# Altium PCB eth_a.PcbDoc
Units mm, origin at the board's own origin, x right, y up, seen from the top; angles counter-clockwise.
Board outline 75 x 75 mm, 2 copper layers (Top Layer, Bottom Layer); 87 components, 70 nets, 372 pads, 90 vias.
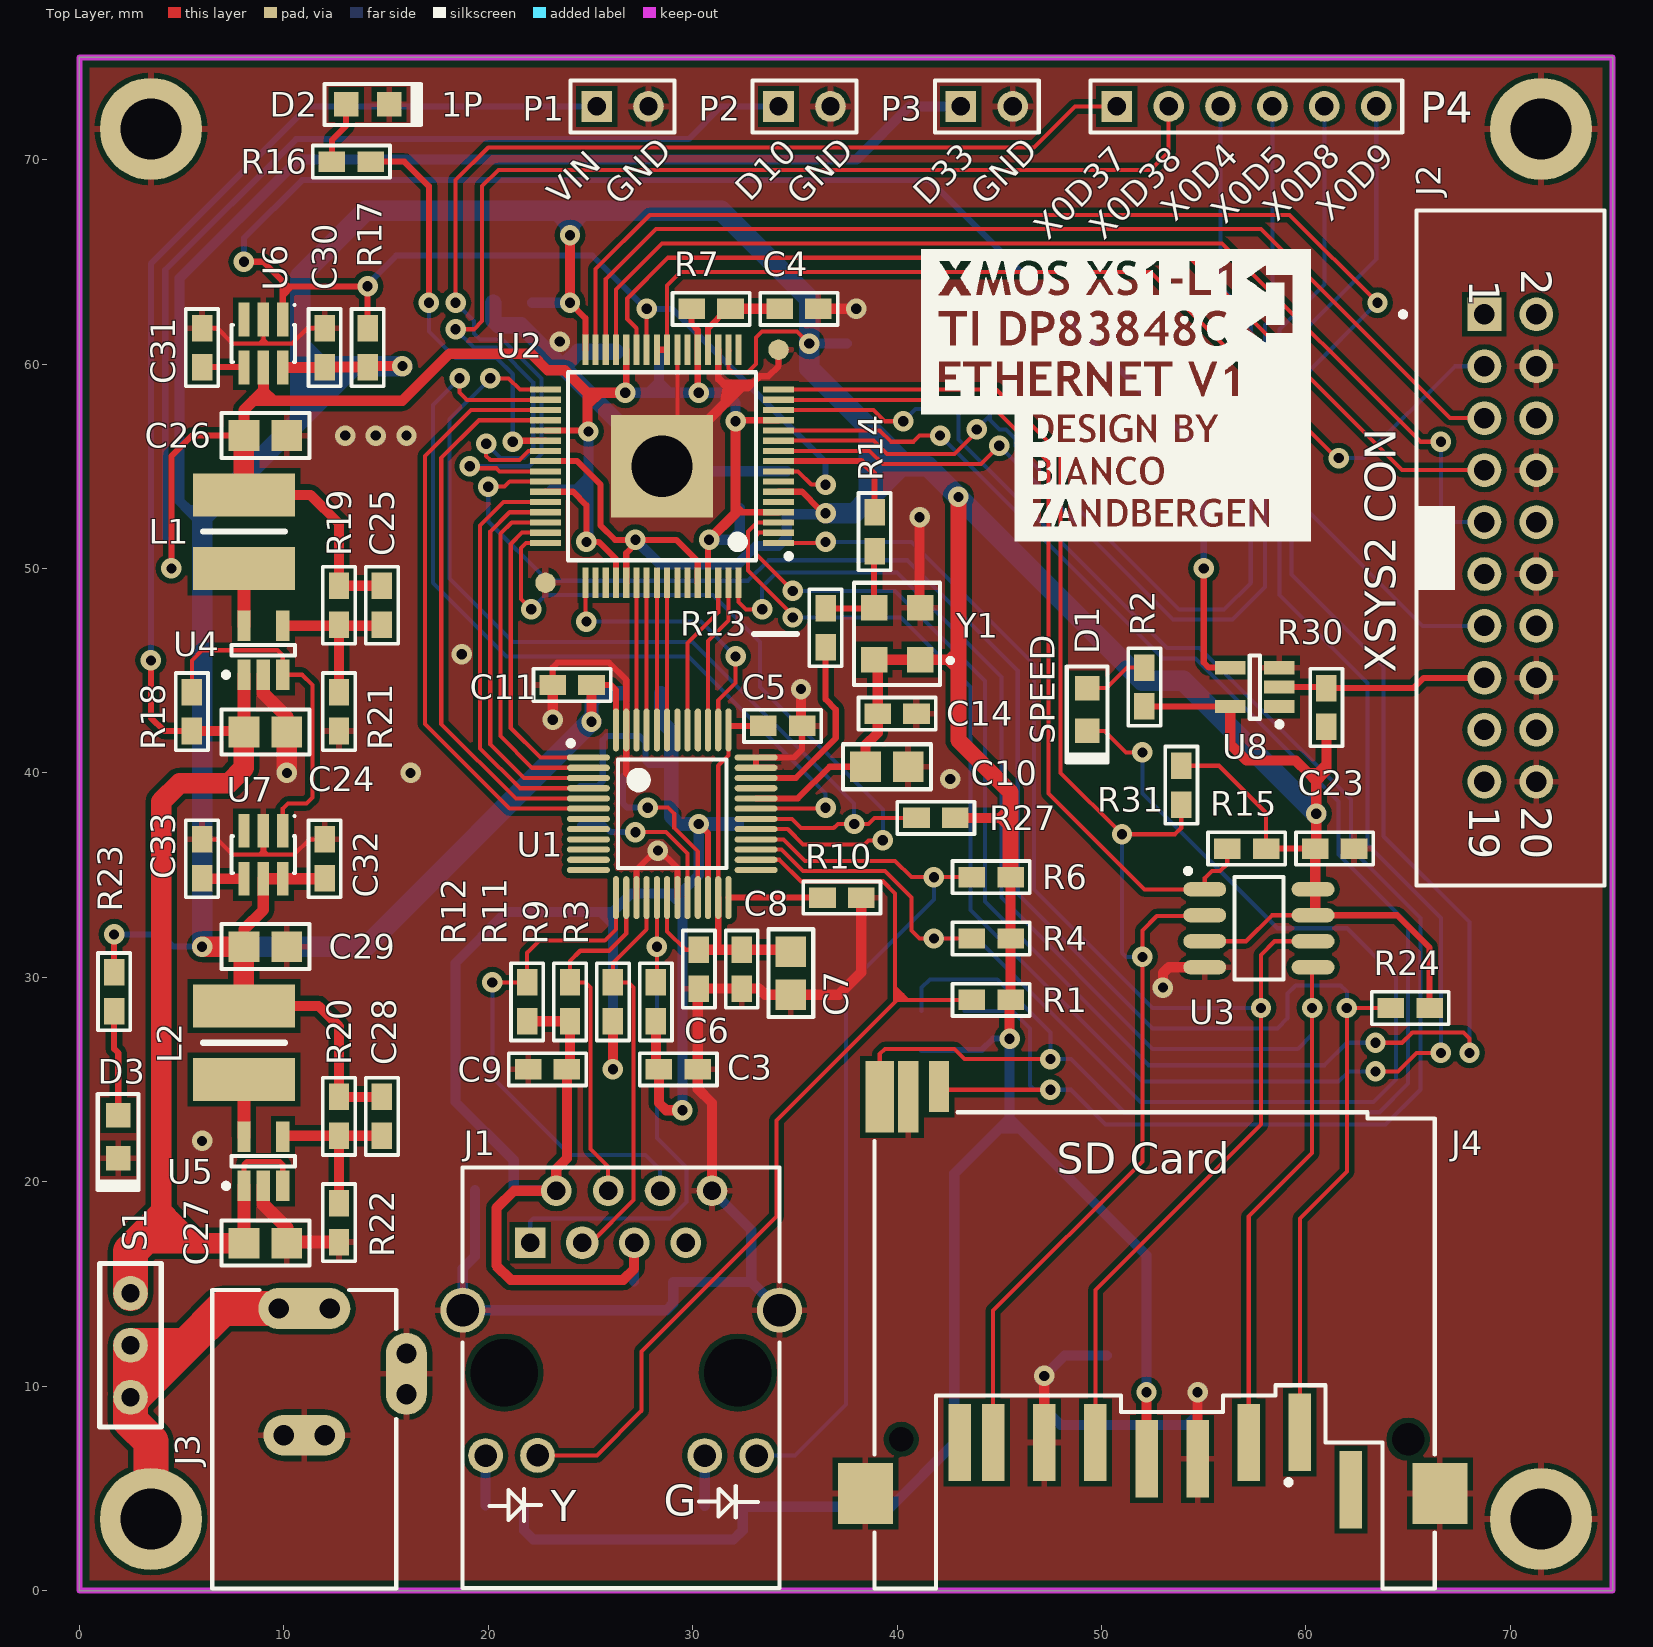
[diagram p0: Top Layer view]
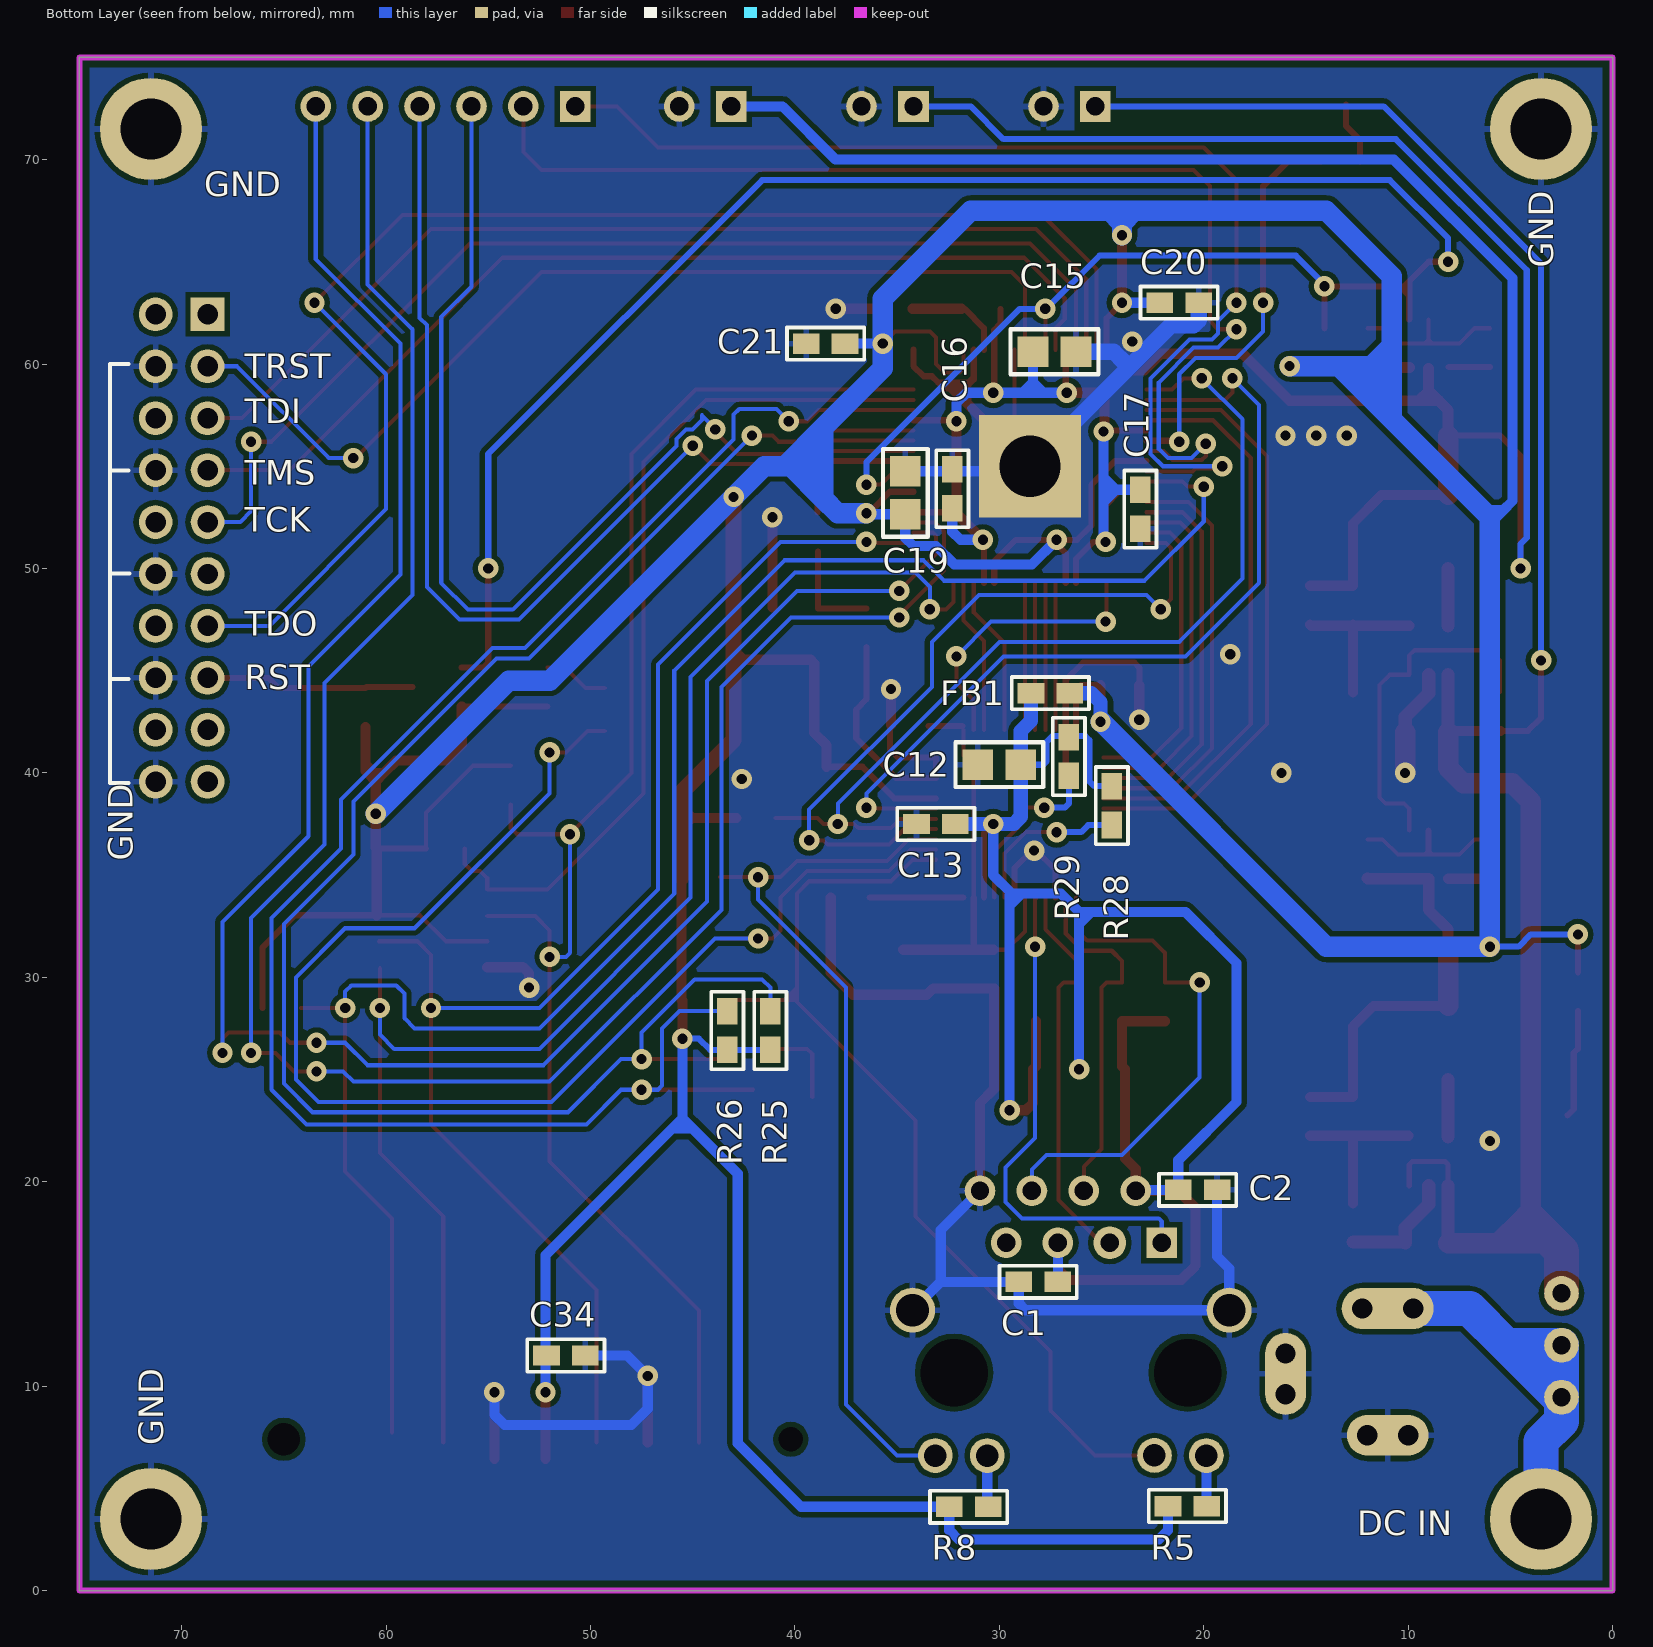
[diagram p1: Bottom Layer view, seen from below]
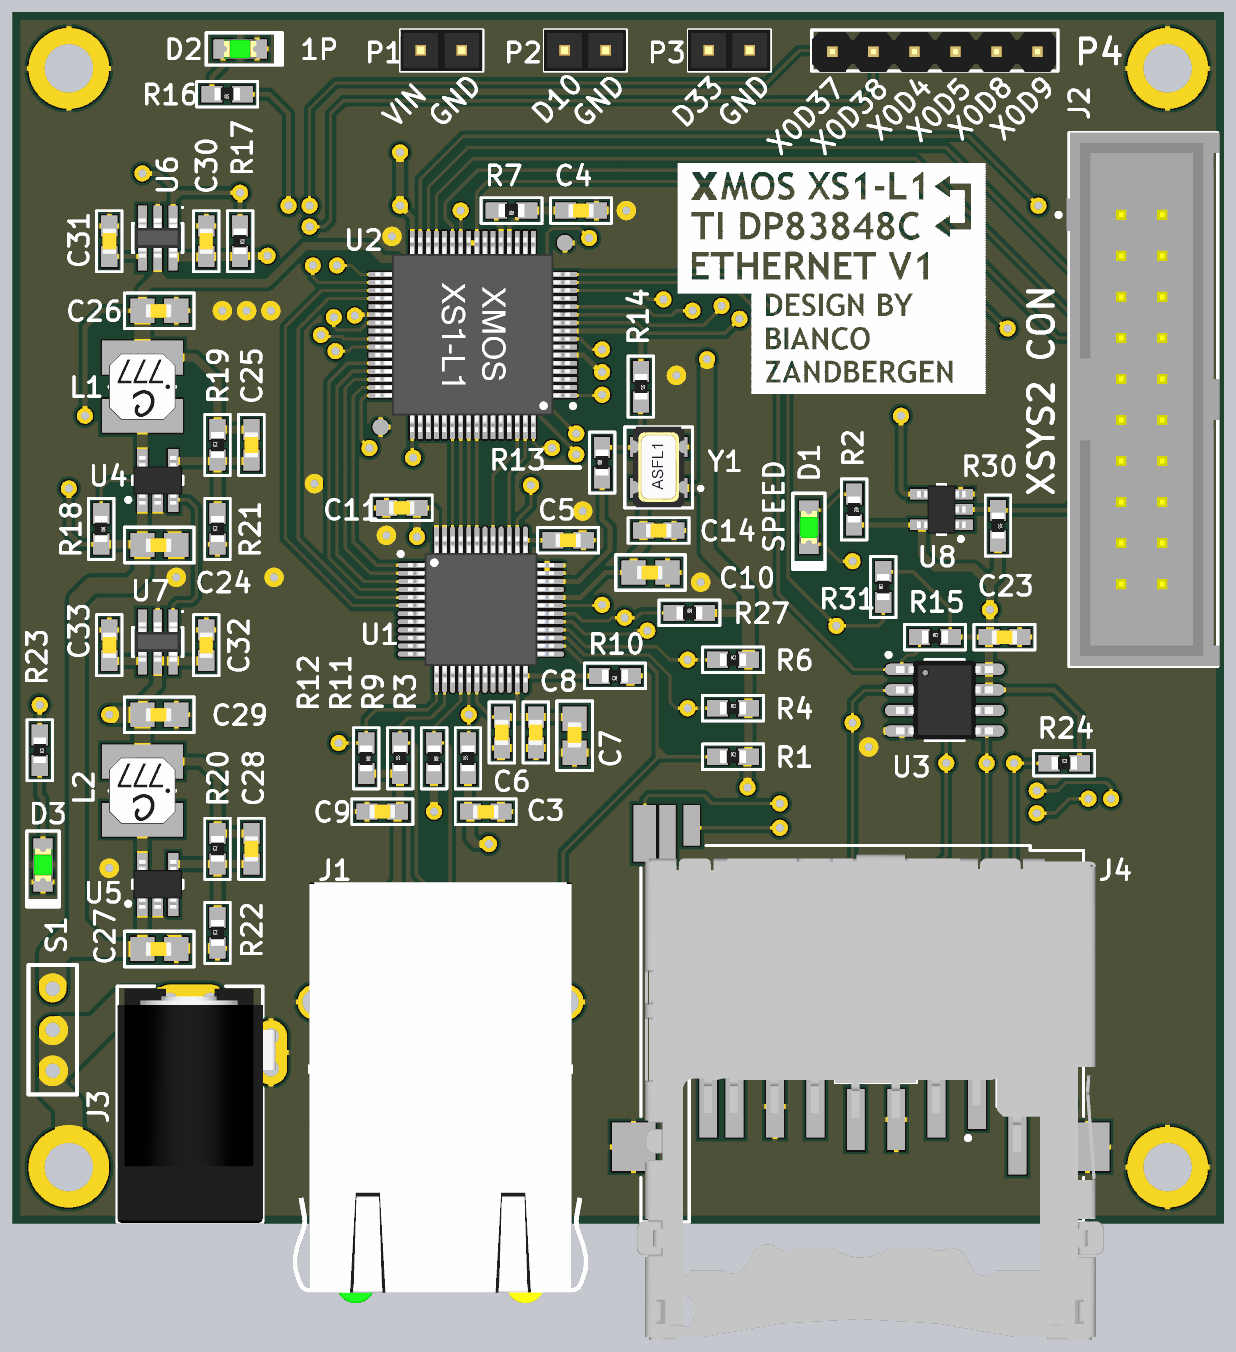
[diagram p2: 3D render of the assembled board from above, using the file's embedded part models]
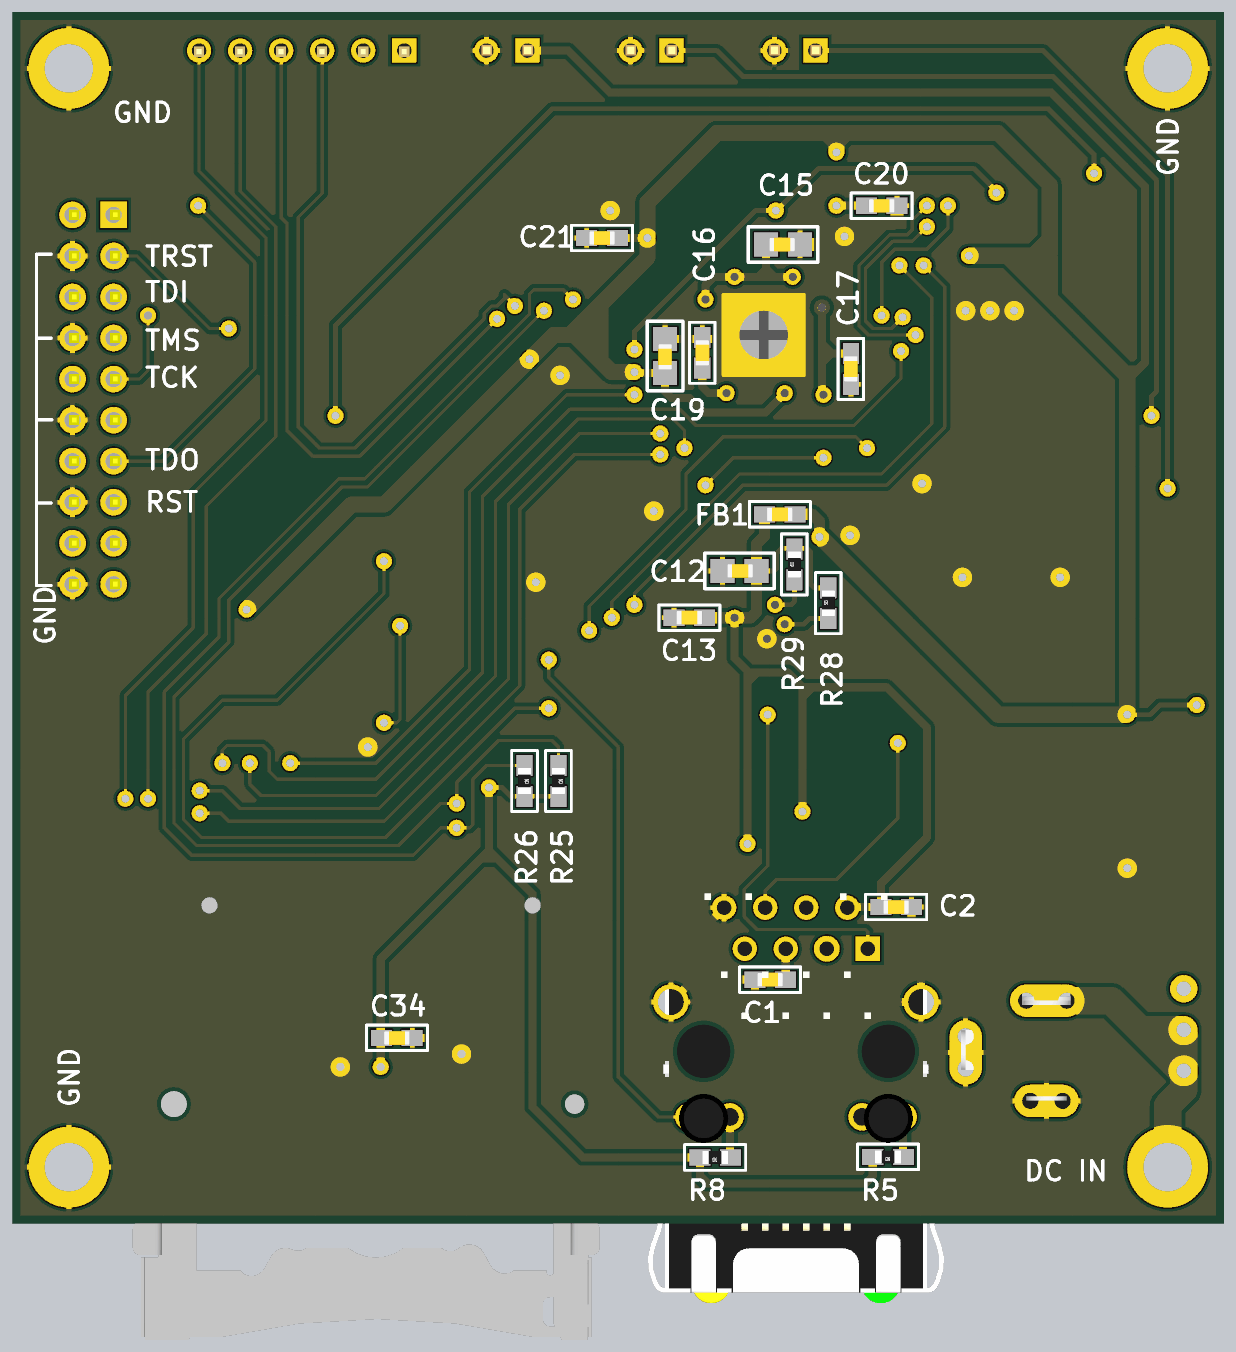
[diagram p3: 3D render of the assembled board from below, using the file's embedded part models]

## Layer stack, top to bottom
Top Layer: signal copper 0.0356
Dielectric: dielectric 0.32, FR-4, Dk 4.8
Bottom Layer: signal copper 0.0356

## Board outline
0,0 75,0 75,75 0,75

## Design rules (kind name [scope] priority, off if disabled: settings)
Clearance Clearance_Polygon [InPolygon] p1: gap=0.25
Clearance [All] p2: gap=0.2
ComponentClearance [All] p1 off: gap=0.254 collisioncheckmode=3 verticalgap=0.254 showdistances=FALSE
HoleSize [All] p1: absolutevalues=TRUE maxlimit=6 minlimit=0.025 maxpercent=80.000 minpercent=20.000
MinimumSolderMaskSliver [All] p1: minsoldermaskwidth=0.1
PolygonConnect PolygonConnect_ExposedPadAndVIA [(IsPad && Id = 'U2-65') Or IsVIa] p1: connectstyle=Direct reliefconductorwidth=0.254 reliefentries=4 polygonreliefangle="90 Angle"
PolygonConnect [All] p2: connectstyle=Relief reliefconductorwidth=0.3 reliefentries=4 polygonreliefangle="90 Angle"
RoomDefinition eth_a [InComponentClass('eth_a')] p1 off: confinementstyle=ConfineIn formatcopy=TRUE lockcomponents=FALSE outline 77.537,-16.412 144,-16.412 144,79.092 77.537,79.092
RoutingVias [All] p1: holewidth=0.5 width=1 viastyle="Through Hole" minholewidth=0.5 minwidth=1 maxholewidth=0.5 maxwidth=1
SilkToSilkClearance [All] p1: silktosilkclearance=0.1
SilkscreenOverComponentPads [All] p1: minsilkscreentomaskgap=0.1
SolderMaskExpansion [All] p1: expansion=0.102
Width [All] p1: maxlimit=2 minlimit=0.2 preferedwidth=0.2 minimp=50.000000 maximp=50.000000 favimp=50.000000
23 further rules are at their usual default settings.

## Components (designator, comment, footprint, x,y, rotation, side; value= is the part's Value field where it differs from the comment)
C1 "Cap" 1608[0603]_CAP 28.1,15.1 r180 bottom
C2 "Cap" 1608[0603]_CAP 20.3,19.6 r0 bottom
C3 "Cap" 1608[0603]_CAP 29.3,25.5 r180 top
C4 "Cap" 1608[0603]_CAP 35.2,62.7 r180 top
C5 "Cap" 1608[0603]_CAP 34.4,42.3 r180 top
C6 "Cap" 1608[0603]_CAP 30.3,30.4 r90 top
C7 "Cap" 2012[0805]_CAP 34.8,30.2 r90 top
C8 "Cap" 1608[0603]_CAP 32.4,30.4 r90 top
C9 "Cap" 1608[0603]_CAP 22.9,25.5 r0 top
C10 "Cap" 2012[0805]_CAP 39.5,40.3 r180 top
C11 "Cap" 1608[0603]_CAP 24.1,44.3 r0 top
C12 "Cap" 2012[0805]_CAP 30,40.4 r180 bottom
C13 "Cap" 1608[0603]_CAP 33.1,37.5 r180 bottom
C14 "Cap" 1608[0603]_CAP 40,42.9 r180 top
C15 "Cap" 2012[0805]_CAP 27.3,60.6 r0 bottom
C16 "Cap" 1608[0603]_CAP 32.3,53.9 r270 bottom
C17 "Cap" 1608[0603]_CAP 23.1,52.9 r90 bottom
C19 "Cap" 2012[0805]_CAP 34.6,53.7 r270 bottom
C20 "Cap" 1608[0603]_CAP 21.2,63 r0 bottom
C21 "Cap" 1608[0603]_CAP 38.5,61 r180 bottom
C23 "Cap" 1608[0603]_CAP 61.4,36.3 r180 top
C24 "Cap" 2012[0805]_CAP 9.1,42 r180 top
C25 "Cap" 1608[0603]_CAP 14.8,48.2 r90 top
C26 "Cap" 2012[0805]_CAP 9.1,56.5 r180 top
C27 "Cap" 2012[0805]_CAP 9.1,17 r180 top
C28 "Cap" 1608[0603]_CAP 14.8,23.2 r90 top
C29 "Cap" 2012[0805]_CAP 9.1,31.5 r180 top
C30 "Cap" 1608[0603]_CAP 12,60.8 r270 top
C31 "Optional" 1608[0603]_CAP 6,60.8 r270 top
C32 "Cap" 1608[0603]_CAP 12,35.8 r270 top
C33 "Optional" 1608[0603]_CAP 6,35.8 r270 top
C34 "Cap" 1608[0603]_CAP 51.2,11.5 r0 bottom
D1 "LED3" 2012[0805]_LED 49.3,43.1 r270 top
D2 "LED3" 2012[0805]_LED 14.1,72.7 r0 top
D3 "LED3" 2012[0805]_LED 1.9,22.2 r270 top
FB1 "Ferrite Bead" 1608[0603]_FB 27.5,43.9 r0 bottom
J1 "Steward con RJ45 with magnetics" "Steward Con RJ45" 26.5,0.127 r0 top
J2 "XTAG2 Con" IDC2.54-V20D 70,51 r270 top
J3 "PWR2.5" KLD-0202 11,0.1 r90 top
J4 "SDAMB-01201BT00" SDCARD-SDAMB-012 52.5,14.7 r0 top
L1 "Inductor" BOURNS_SRR4011 8.05,51.8 r180 top
L2 "Inductor" BOURNS_SRR4011 8.05,26.8 r180 top
P1 "Header 2" HDR1X2 25.3,72.6 r0 top
P2 "Header 2" HDR1X2 34.2,72.6 r0 top
P3 "Header 2" HDR1X2 43.12,72.6 r0 top
P4 "Header 6" HDR1X6 50.74,72.6 r0 top
R1 "Res" 1608[0603]_RES 44.6,28.9 r0 top
R2 "Res" 1608[0603]_RES 52.1,44.2 r270 top
R3 "Res" 1608[0603]_RES 28.2,28.8 r90 top
R4 "Res" 1608[0603]_RES 44.6,31.9 r0 top
R5 "Res" 1608[0603]_RES 20.8,4.137 r0 bottom
R6 "Res" 1608[0603]_RES 44.6,34.9 r0 top
R7 "Res" 1608[0603]_RES 30.9,62.7 r180 top
R8 "Res" 1608[0603]_RES 31.5,4.1 r0 bottom
R9 "Res" 1608[0603]_RES 26.1,28.8 r270 top
R10 "Res" 1608[0603]_RES 37.3,33.9 r180 top
R11 "Res" 1608[0603]_RES 24,28.8 r90 top
R12 "Res" 1608[0603]_RES 21.9,28.8 r270 top
R13 "Res" 1608[0603]_RES 36.5,47.1 r90 top
R14 "Res" 1608[0603]_RES 38.9,51.8 r270 top
R15 "Res" 1608[0603]_RES 57.1,36.3 r0 top
R16 "Res" 1608[0603]_RES 13.3,69.9 r180 top
R17 "Res" 1608[0603]_RES 14.1,60.8 r270 top
R18 "Res" 1608[0603]_RES 5.5,43 r270 top
R19 "Res" 1608[0603]_RES 12.7,48.2 r90 top
R20 "Res" 1608[0603]_RES 12.7,23.2 r90 top
R21 "Res" 1608[0603]_RES 12.7,43 r90 top
R22 "Res" 1608[0603]_RES 12.7,18 r90 top
R23 "Res" 1608[0603]_RES 1.7,29.3 r270 top
R24 "Res" 1608[0603]_RES 65.1,28.5 r0 top
R25 "Res" 1608[0603]_RES 41.2,27.4 r270 bottom
R26 "Res" 1608[0603]_RES 43.3,27.4 r270 bottom
R27 "Res" 1608[0603]_RES 41.9,37.8 r0 top
R28 "Res" 1608[0603]_RES 24.5,38.4 r90 bottom
R29 "Res" 1608[0603]_RES 26.6,40.8 r90 bottom
R30 "Res" 1608[0603]_RES 61,43.2 r270 top
R31 "Res" 1608[0603]_RES 53.9,39.4 r90 top
S1 "SW-SPDT" SIP-3 2.5,12 r90 top
U1 "DP83848CVV" TSQFP50P900X900-48M 29,38 r0 top
U2 "XS1_L1_64LQFP" XMOS_QFP50P1200X1200X160-65N 28.5,55 r180 top
U3 "AT25DF041A" SOIC150-8_M 57.7,32.4 r0 top
U4 "NCP1521" SOT23-5 9,46 r90 top
U5 "NCP1521" SOT23-5 9,21 r90 top
U6 "TPS3808G09" SOT23-6 9,61 r180 top
U7 "TPS3808G30" SOT23-6 9,36 r180 top
U8 "SN74LVC1G07" SOT23-5 57.5,44.2 r180 top
Y1 "25 MHz Oscillator" OSC_32_50 40,46.8 r90 top

## Footprints (in the part's own frame and the unit in brackets; to place one, negate y for a bottom-side part, rotate by r counter-clockwise, add the part's x,y. Pads: shape width x height; smd on the part's side, far side on the other; paste and mask are expansions set on the pad)
1608[0603]_CAP [mm] "Chip Resistor / Capacitor; Body 1.6 x 0.8 mm (LxW typ) Handsoldering optimized"
  rect 1.3x1 smd: 1(-0.95,0) 2(0.95,0)
  silkscreen extent -1.89,-0.79 1.89,0.79, body extent -0.8,-0.43 0.8,0.43, height 0.8
1608[0603]_FB [mm] "Chip Resistor / Capacitor; Body 1.6 x 0.8 mm (LxW typ) Handsoldering optimized"
  rect 1.3x1 smd: 1(-0.95,0) 2(0.95,0)
  silkscreen extent -1.89,-0.79 1.89,0.79, body extent -0.8,-0.43 0.8,0.43, height 0.8
1608[0603]_RES [mm] "Chip Resistor / Capacitor; Body 1.6 x 0.8 mm (LxW typ) Handsoldering optimized"
  rect 1.3x1 smd: 1(-0.95,0) 2(0.95,0)
  silkscreen extent -1.89,-0.79 1.89,0.79, body extent -0.8,-0.4 0.8,0.4, height 0.3
2012[0805]_CAP [mm] "Chip Resistor / Capacitor; Body 2.0 x 1.3 mm (LxW typ) Handsoldering optimized"
  rect 1.5x1.5 smd: 1(-1.05,0) 2(1.05,0)
  silkscreen extent -2.15,-1.1 2.15,1.1, body extent -0.75,-0.43 0.85,0.44, height 0.8
2012[0805]_LED [mm] "Kingbright KPHCM-2012SGC-T"
  rect 1.2x1.2 smd: 1(-1.05,0) 2(1.05,0)
  silkscreen extent -2.1,-1 2.6,1, body extent -1.01,-0.62 1.01,0.63, height 1.1
BOURNS_SRR4011 [mm] "5x5mm Inductor"
  rect 5x2.1 smd: 1(0,1.8) 2(0,-1.8)
  silkscreen extent -2,0 2,0, body extent -2.05,-2.05 2.05,2.05, height 1.8
HDR1X2 [mm] "Connector; Header; 2 Position"
  rect 1.5x1.5 hole 0.9: 1(0,0)
  round 1.5 hole 0.9: 2(2.54,0)
  silkscreen extent -1.27,-1.27 3.81,1.27, body extent -1.29,-1.25 3.79,1.29, height 8.54
HDR1X6 [mm] "Connector; Header; 6 Position"
  rect 1.5x1.5 hole 0.9: 1(0,0)
  round 1.5 hole 0.9: 2(2.54,0) 3(5.08,0) 4(7.62,0) 5(10.16,0) 6(12.7,0)
  silkscreen extent -1.27,-1.27 13.97,1.27, body extent -1.26,-1.32 13.88,1.18, height 8.2
IDC2.54-V20D [mm] "Connector; IDC, Low Profile Male Header, Thru-Hole; 20 Position; Vertical; Pitch 2.54 mm; Body 33.02 x 9.2 x 9.45 mm (LxWxH)"
  rect 1.65x1.65 hole 1: 1(-11.43,-1.27)
  round 1.65 hole 1: 2(-11.43,1.27) 3(-8.89,-1.27) 4(-8.89,1.27) 5(-6.35,-1.27) 6(-6.35,1.27) 7(-3.81,-1.27) 8(-3.81,1.27) 9(-1.27,-1.27) 10(-1.27,1.27) 11(1.27,-1.27) 12(1.27,1.27) 13(3.81,-1.27) 14(3.81,1.27) 15(6.35,-1.27) 16(6.35,1.27) 17(8.89,-1.27) 18(8.89,1.27) 19(11.43,-1.27) 20(11.43,1.27)
  silkscreen extent -16.51,-5.37 16.51,4.6, body extent -16.52,-4.75 16.5,4.72, height 9.27
KLD-0202 [mm] "DC Power Jack, 2.5mm, KLD Series, PCB Mount"
  oval 2x4.5 all layers, no hole: 1(13.7,0)
  round 1.5 hole 1: 1A(13.7,-1.25) 1B(13.7,1.25) 2A(7.5,-1) 2B(7.5,1) 3A(9.5,-5) 3B(11.5,-5)
  oval 2x4 all layers, no hole: 2(7.5,0)
  oval 4x2 all layers, no hole: 3(10.5,-5)
  silkscreen extent 0,-4.5 14.6,4.5, body extent -0.05,-5.3 14.45,4.5, height 11
OSC_32_50 [mm] "Oscillator, 3,2mm x 5mm"
  rect 1.25x1.3 smd: 1(-1.27,-1.125) 2(1.27,-1.125) 3(1.27,1.125) 4(-1.27,1.125)
  silkscreen extent -2.5,-2.7 2.5,2.1, body extent -2.47,-1.6 2.53,1.6, height 1.33
SDCARD-SDAMB-012 [mm] "Connector; SD Card Type A, SM, 9 Position, Right Angle, Pitch 2.5 mm, Body 23.3 x 27.4 x 3.4 mm (LxWxH)"
  rect 1.1x3.79 smd: 1(7.2,-6.955) 2(4.7,-7.455) 3(2.2,-8.255) 4(-0.3,-8.255) 5(-2.8,-7.455) 6(-5.3,-7.455) 7(-7.8,-7.455) 8(-9.425,-7.455) 9(9.7,-9.755)
  rect 2.7x3 smd: MH1(14.05,-9.95) MH2(-14.05,-9.95)
  round 0.9 hole 1.2 unplated: MH3(-12.3,-7.3)
  round 1.3 hole 1.6 unplated: MH4(12.5,-7.3)
  rect 1x3.5 smd: SW1(-11.95,9.45)
  rect 1.4x3.5 smd: SW2(-13.35,9.45)
  rect 1x2.5 smd: SW3(-10.45,9.95)
  silkscreen extent -13.6,-14.6 13.8,8.7, body extent -13.85,-21.9 15.05,8.15, height 3.15
SIP-3 [mm]
  round 1.7 hole 0.9: 1(-2.54,0) 2(0,0) 3(2.54,0)
  silkscreen extent -4,-1.5 4,1.5
SOIC150-8_M [mm] "8-Pin Plastic Narrow Body Small Outline Integrated Circuit 1.27 mm Pitch, IPC Low Density"
  oval 2.1x0.7 smd: 1(-2.65,1.905) 2(-2.65,0.635) 3(-2.65,-0.635) 4(-2.65,-1.905) 5(2.65,-1.905) 6(2.65,-0.635) 7(2.65,0.635) 8(2.65,1.905)
  silkscreen extent -3.59,-2.5 1.2,2.93, body extent -3,-2.45 3,2.45, height 1.7
SOT23-5 [mm] "SOT23, 5-Leads, Body 2.9x1.6mm, Pitch 0.95mm, Lead Span 2.8mm, IPC Medium Density"
  rect 1.5x0.65 smd: 1(-1.2,0.95) 2(-1.2,0) 3(-1.2,-0.95) 4(1.2,-0.95) 5(1.2,0.95)
  silkscreen extent -1.32,-1.55 0.25,1.95, body extent -1.5,-1.5 1.5,1.5, height 1.5
SOT23-6 [mm] "SOT-23/SC-74A; 6 Leads; Body 3 x 3 mm, inc. leads (LxW max)"
  rect 0.55x1.65 smd: 1(-0.95,-1.175) 2(0,-1.175) 3(0.95,-1.175) 4(0.95,1.175) 5(0,1.175) 6(-0.95,1.175)
  silkscreen extent -1.58,-1.94 1.55,0.9, body extent -1.4,-1.21 1.39,1.21, height 1.09
"Steward Con RJ45" [mm] "Connector; PCB Jack, Thru-Hole; 1-Port; Unshielded without Lightpipes; Right Angle"
  rect 1.5x1.5 hole 0.9: 1(-4.445,16.89)
  round 1.5 hole 0.9: 2(-3.175,19.43) 4(-0.635,19.43) 5(0.635,16.89) 6(1.905,19.43) 7(3.168,16.889) 8(4.445,19.43)
  round 1.6 hole 0.9: 3(-1.905,16.89)
  round 2.2 hole 1.6: 9(-7.745,13.59) 10(7.745,13.59)
  round 1.7 hole 1.1: 11(-6.63,6.48) 12(-4.09,6.484) 13(4.09,6.48) 14(6.63,6.48)
  round 2.95 hole 3.3 unplated: MH1(-5.715,10.54) MH2(5.715,10.54)
  silkscreen extent -7.75,0 7.75,20.58, body extent -9.17,-5.05 9.17,21, height 14.36
TSQFP50P900X900-48M [mm] "Thin QFP, 48-Leads, Body 7x7mm, Pitch 0.5mm, IPC Low Density"
  oval 2.1x0.3 smd: 1(-4.1,2.75) 2(-4.1,2.25) 3(-4.1,1.75) 4(-4.1,1.25) 5(-4.1,0.75) 6(-4.1,0.25) 7(-4.1,-0.25) 8(-4.1,-0.75) 9(-4.1,-1.25) 10(-4.1,-1.75) 11(-4.1,-2.25) 12(-4.1,-2.75) 25(4.1,-2.75) 26(4.1,-2.25) 27(4.1,-1.75) 28(4.1,-1.25) 29(4.1,-0.75) 30(4.1,-0.25) 31(4.1,0.25) 32(4.1,0.75) 33(4.1,1.25) 34(4.1,1.75) 35(4.1,2.25) 36(4.1,2.75)
  oval 0.3x2.1 smd: 13(-2.75,-4.1) 14(-2.25,-4.1) 15(-1.75,-4.1) 16(-1.25,-4.1) 17(-0.75,-4.1) 18(-0.25,-4.1) 19(0.25,-4.1) 20(0.75,-4.1) 21(1.25,-4.1) 22(1.75,-4.1) 23(2.25,-4.1) 24(2.75,-4.1) 37(2.75,4.1) 38(2.25,4.1) 39(1.75,4.1) 40(1.25,4.1) 41(0.75,4.1) 42(0.25,4.1) 43(-0.25,4.1) 44(-0.75,4.1) 45(-1.25,4.1) 46(-1.75,4.1) 47(-2.25,4.1) 48(-2.75,4.1)
  silkscreen extent -5.09,-2.65 2.65,3.57, body extent -4.5,-4.5 4.52,4.53, height 1.35
XMOS_QFP50P1200X1200X160-65N [mm]
  rect 1.5x0.3 smd: 1(-5.7,3.75) 2(-5.7,3.25) 3(-5.7,2.75) 4(-5.7,2.25) 5(-5.7,1.75) 6(-5.7,1.25) 7(-5.7,0.75) 8(-5.7,0.25) 9(-5.7,-0.25) 10(-5.7,-0.75) 11(-5.7,-1.25) 12(-5.7,-1.75) 13(-5.7,-2.25) 14(-5.7,-2.75) 15(-5.7,-3.25) 16(-5.7,-3.75) 33(5.7,-3.75) 34(5.7,-3.25) 35(5.7,-2.75) 36(5.7,-2.25) 37(5.7,-1.75) 38(5.7,-1.25) 39(5.7,-0.75) 40(5.7,-0.25) 41(5.7,0.25) 42(5.7,0.75) 43(5.7,1.25) 44(5.7,1.75) 45(5.7,2.25) 46(5.7,2.75) 47(5.7,3.25) 48(5.7,3.75)
  rect 0.3x1.5 smd: 17(-3.75,-5.7) 18(-3.25,-5.7) 19(-2.75,-5.7) 20(-2.25,-5.7) 21(-1.75,-5.7) 22(-1.25,-5.7) 23(-0.75,-5.7) 24(-0.25,-5.7) 25(0.25,-5.7) 26(0.75,-5.7) 27(1.25,-5.7) 28(1.75,-5.7) 29(2.25,-5.7) 30(2.75,-5.7) 31(3.25,-5.7) 32(3.75,-5.7) 49(3.75,5.7) 50(3.25,5.7) 51(2.75,5.7) 52(2.25,5.7) 53(1.75,5.7) 54(1.25,5.7) 55(0.75,5.7) 56(0.25,5.7) 57(-0.25,5.7) 58(-0.75,5.7) 59(-1.25,5.7) 60(-1.75,5.7) 61(-2.25,5.7) 62(-2.75,5.7) 63(-3.25,5.7) 64(-3.75,5.7)
  rect 5x5 hole 3: 65(0,0)
  round 1 smd: FID1(-5.7,-5.7) FID2(5.7,5.7)
  silkscreen extent -6.33,-4.6 4.6,4.6, body extent -6,-6.03 6.03,6, height 1.35

## Part data
C1 C2 C3 C4 C5 C6 C7 C8 C9 C10 C11 C12 C13 C14 C15 C16 C17 C19 C20 C21 C23 C24 C25 C26 C27 C28 C29 C30 C32 C34: "Capacitor"
C31 C33: library part Cap, "Capacitor"
D1 D2 D3: "SMD LED 0805"
J1: "Right Angle,RJ45-Keyed, Flange Mount PCB Jack"
J2: library part XTAG2_CON, "XTAG2 Connector"
J3: "Low Voltage Power Supply Connector"
J4: "Secure Digital Card Connector, Type A without Cover; Surface Mount; 9-Position, 1u\" Au Plating"
P1 P2 P3: "Header, 2-Pin"
P4: "Header, 6-Pin"
R1 R2 R3 R4 R5 R6 R7 R8 R9 R10 R11 R12 R13 R14 R15 R16 R17 R18 R19 R20 R21 R22 R23 R24 R25 R26 R27 R28 R29 R30 R31: "Resistor"
S1: "SPDT Subminiature Toggle Switch, Right Angle Mounting, Vertical Actuation"
U1: "PHYTER® Commercial Temperature Single Port 10/100 Mb/s Ethernet Physical Layer Transceiver, 48-pin LQFP"
U3: "4Mbit SPI Flash"
U4 U5: "Buck Converter"
U6: "Power on Reset controller 0.9V"
U7: "Power on Reset controller 3.0V"
U8: "Buffer (open drain output)"
Y1: library part oscillator, "Crystal Oscillator"

## Free pads (board coordinates)
  round 5 hole 3: MH0(3.5,3.5) MH1(3.5,71.5) MH2(71.5,71.5) MH3(71.5,3.5)

## Via types
v1: diameter 1, hole 0.5, Top Layer to Bottom Layer, 89 vias
v2: diameter 1, hole 0.5, Top Layer to Bottom Layer, tented bottom, 1 vias

## Nets (pads, with @x,y where several pads share a name; then routed paths per layer and width w, separated by ;. In a path a pad name is that pad's centre, name@x,y a point inside that pad or via, vN(x,y) a via of type N, cw(c..) or ccw(c..) an arc to the next point about the centre after c; other vN are vias at no path point)
A33: C1.2 C2.2 C3.2 C9.2 C12.2 C13.2 FB1.2 J1.2 J1.5 R3.1 R9.2 R11.1 R12.2 R28.2 R29.2 U1.22 | length 105.9
  Top Layer w0.3: v1(30.3,37.5) 30.75,37.05 U1.22
  Top Layer w0.5: R12.2 R11.1 C9.2@24,25.65 ; C9.2 23.85,21.15 23.325,20.625 J1.2 21.257,19.557 20.4,18.7 20.4,15.9 21.1,15.2 26.6,15.2 27.135,15.735 J1.5 ; v1(26.1,25.5) R9.2 ; C3.2@28.2,25.65 R3.1 ; C3.2 28.35,23.85 28.7,23.5 v1(29.5,23.5)
  Bottom Layer w0.3: R28.2 25.35,39.35 25.6,39.6 25.6,41.6 25.8,41.8 27.4,41.8 27.7,41.5 27.7,40.55 27.85,40.4 C12.2
  Bottom Layer w0.5: J1.2@23.282,19.6 C2.2 21.25,21.05 18.4,23.9 18.4,30.7 20.9,33.2 26.1,33.2 ; 25.6,33.1 26.1,32.6 ; v1(26.1,25.5) 26.1,32.6 ; C1.2@27.135,15.115 J1.5 ; 28.9,34.1 29.5,33.5 ; v1(29.5,23.5) 29.5,33.5 ; 29.5,34 29.5,33.5 ; v1(30.3,37.5) 30.3,35 29.4,34.1 27,34.1 26.1,33.2 ; 26.1,32.6 26.1,33.2
  Bottom Layer w0.7: FB1.2 28.45,42.55 28.95,42.05 C12.2 28.95,37.85 29.3,37.5 v1(30.3,37.5) C13.2
D10: C15.2 C16.2 C17.2 C25.2 C26.2 L1.2 P2.1 R7.2 R19.2 U2.4 U2.13 U2.21 U2.28 U2.37 U2.43 U2.52 U2.61 U6.5 | length 147.8
  Top Layer w0.3: v1(4.5,50) 4.5,55.5 5.5,56.5 C26.2 ; U2.43 24.15,53.75 24.8,53.1 v1(24.8,51.3) 25.4,51.3 26.25,50.45 U2.52 ; U2.37 24.85,56.75 v2(24.9,56.7) ; v1@26.7,58.65 26.75,58.65 U2.28 ; R7.2 29.95,61.96 30.25,61.66 U2.21 v1@30.25,58.65 ; U2.61 v1@30.75,51.35 ; 32.1,52.7 32.15,52.75 32.45,52.75 ; 32.1,53.1 32.45,52.75 ; v1@32.15,57.25 U2.13 ; U2.4 32.45,52.75
  Top Layer w0.5: L1.2 11.3,53.6 12.7,52.2 R19.2 C25.2 ; 8.5,58.2 9.5,58.2 ; 9.003,58.703 9.5,58.206 9.5,58.2 ; v2@24.85,56.75 24.85,58 ; v1@26.75,58.5 26.65,58.6 25.45,58.6 ; v1@30.75,51.35 v1(30.8,51.4) 32.1,52.7 32.1,53.1 v1(32.1,57.2) ; 9.5,58.2 15.8,58.2 18.1,60.5 22.1,60.5 22.9,59.7 23.75,59.7 24.85,58.6 ; 24.85,58 25.45,58.6 ; 24.85,58 24.85,58.6 ; 24.85,58.6 25.45,58.6
  Top Layer w0.55: C26.2 8.05,57.75 8.5,58.2 9.003,58.703 U6.5@9.003,59.787
  Top Layer w1: L1.2 C26.2
  Bottom Layer w0.3: v1(4.5,50) 4.5,51.2 4.2,51.5 4.2,64.6 10.6,71 29.8,71 31.4,72.6 P2.1
  Bottom Layer w0.5: C17.2 24.3,53.85 ; 24.85,53.3 24.3,53.85 ; 24.85,53.85 24.3,53.85 ; v1@24.9,51.4 24.9,54.45 ; v2(24.9,56.7) 24.9,54.45 ; v1(26.7,58.6) 27.85,58.6 ; 28.35,58.65 28.35,59.1 ; C15.2 28.35,59.1 ; v1(30.8,51.4) 31.9,51.4 32.3,51.8 C16.2 ; v1(32.1,57.2) 32.1,58.1 31.6,58.6 v1(30.3,58.6) 28.85,58.6 ; 24.3,53.85 24.9,54.45 ; 27.85,58.6 28.35,59.1 ; 27.85,58.6 28.85,58.6 ; 28.35,59.1 28.85,58.6
D33: C10.2 C11.2 C14.2 C19.2 C20.2 C21.2 C23.2 C28.2 C29.2 C30.2 C32.2 C34.2 FB1.1 J4.4 L2.2 P3.1 R1.2 R2.2 R4.2 R5.2 R6.2 R8.2 R15.2 R17.2 R20.2 R23.1 R24.2 R25.2 R26.2 R27.2 R30.2 R31.2 U1.32 U1.48 U2.6 U2.18 U2.32 U2.40 U2.53 U2.60 U3.3 U3.7 U3.8 U6.6 U7.5 U7.6 U8.5 Y1.1 Y1.4 | length 457.5
  Top Layer w0.2: U2.18@31.8,60.65 U2.18 31.75,59.786 31.936,59.6 32.7,59.6 33.1,60 33.1,61.3 33.4,61.6 35.1,61.6 v1(35.7,61) ; R31.2 55.75,40.35 58.05,38.05 R15.2 ; U3.3 57.065,31.765 58.335,33.035 U3.7
  Top Layer w0.3: R23.1 v1(1.7,32.1) ; U2.40 24.35,55.25 25.5,54.1 25.5,52.1 26.2,51.4 v1(27.2,51.4) ; v1(24,63) 24.75,62.25 U2.32 ; C11.2 26,44.3 26.25,44.05 U1.48 ; U2.53 26.75,50.75 27.2,51.2 v1(27.2,51.4) ; U2.60 30.25,50.35 29.2,51.4 v1(27.2,51.4) ; U1.32 35.15,38.75 36.7,40.3 C10.2 ; U2.6 35.35,53.75 36.2,52.9 v1@36.2,52.7 ; R2.2 U8.5 ; R15.2 C23.2 ; U3.7 60.45,33.035 64.465,33.035 66.05,31.45 R24.2
  Top Layer w0.5: L2.2 11.7,28.6 12.7,27.6 R20.2 C28.2 ; R17.2@14.15,59.9 v1(15.8,59.9) ; v1(24,63) v1(24,66.3) ; v1(25.05,42.5) C11.2 ; C10.2 38.45,41.35 39.05,41.95 C14.2 Y1.4@39.05,45.355 ; Y1.4@39.225,45.53 Y1.1 42.53,45.53 ; R27.2 45.05,37.8 ; 42.97,45.53 42.53,45.53 ; 43,45 42.5,45.5 42.53,45.53 ; 43,46 42.53,45.53 ; v1(45.5,27) R1.2@45.5,28.85 ; R1.2 R4.2 R6.2 ; 45.55,37.3 45.05,37.8 ; 45.55,37.8 45.05,37.8 ; 45.55,38.3 45.05,37.8 ; J4.4 v1(52.2,9.7) ; U8.5 56.3,41.4 57.1,40.6 59.5,40.6 60.1,40 ; U3.7@60.45,33.035 C23.2 ; C23.2@60.5,36.35 v1(60.5,38) 60.5,39.6 ; R30.2 61,40.4 ; 60.1,40 60.6,40 ; 60.1,40 60.5,39.6 ; 60.5,39.6 60.9,40 ; 60.6,40 61,40.4 ; 60.6,40 60.9,40 ; 60.9,40 61,40.1 61,40.4
  Top Layer w0.55: C29.2 8.05,32.35 9,33.3 U7.5 U7.6 11.975,34.825 C32.2 ; U6.6 C30.2@11.975,59.825 ; C30.2 R17.2
  Top Layer w0.8: v1(43,53.5) 43,46 43,45 43,41.6 45.55,39.05 45.55,38.3 45.55,37.8 45.55,37.3 R6.2
  Top Layer w1: v1(6,31.5) C29.2 L2.2
  Bottom Layer w0.3: v1(1.7,32.1) 4,32.1 4.6,31.5 v1(6,31.5) ; 5.7,52.5 6,52.5 ; R25.2 R26.2 44.15,26.45 44.7,27 v1(45.5,27)
  Bottom Layer w0.5: 5.7,52.5 5.35,52.85 ; 6.35,52.85 5.35,52.85 ; R5.2 21.75,2.95 22.2,2.5 32,2.5 32.45,2.95 R8.2 39.7,4.1 42.8,7.2 42.8,20.4 45,22.6 ; C20.2 v1(24,63) ; v1(27.2,51.4) 28.4,50.2 32.2,50.2 33.1,51.1 34.2,51.1 34.6,51.5 C19.2 36.45,52.65 v1(36.5,52.7) ; v1(35.7,61) C21.2 ; P3.1@43.1,72.6 40.6,72.6 38,70 10.7,70 4.9,64.2 4.9,53.3 5.35,52.85 ; v1(45.5,27) 45.5,23.1 ; 46,22.6 45,22.6 ; v1(52.2,9.7) 52.2,16.4 45.5,23.1 ; 45,22.6 45.5,23.1
  Bottom Layer w0.7: v1(25.05,42.5) 25.05,43.45 25.5,43.9 FB1.1
  Bottom Layer w1: 10.8,60 10.8,60.9 ; v1(15.8,59.9) 13.4,59.9 ; v1(24,66.3) 24,66.9 ; v1(25.05,42.5) 25,42.5 14,31.5 v1(6,31.5) 6,52.5 6.35,52.85 10.8,57.3 ; v1(36.5,52.7) 37.9,52.7 38.6,53.4 ; 39,55.7 39.7,55 ; v1(60.5,38) 54,44.5 52,44.5 v1(43,53.5) 41.5,55 40.5,55 ; 10.8,57.3 10.8,59.4 ; 10.8,57.3 13.4,59.9 ; 10.8,59.4 11.1,59.4 11.95,58.55 11.95,59.75 ; 10.8,59.4 10.8,59.9 11.8,59.9 ; 10.8,60.9 11.8,59.9 ; 10.8,60.9 10.8,64.3 14,67.5 23.4,67.5 ; 11.8,59.9 12.1,59.9 ; 11.8,59.9 11.95,59.75 ; 11.95,59.75 12.1,59.9 ; 12.1,59.9 13.4,59.9 ; 23.4,67.5 24,67.5 ; 23.4,67.5 24,66.9 ; 24,66.9 24,67.5 ; 24,66.9 24.6,67.5 ; 24,67.5 24.6,67.5 ; 24.6,67.5 31.4,67.5 35.7,63.2 v1(35.7,61) 35.7,59.8 38.6,56.9 ; 38.6,53.4 38.6,55 ; 38.6,53.4 40.2,55 ; 38.6,55 38.6,56.9 ; 38.6,55 39.7,55 ; 38.6,56.9 40.5,55 ; 39.7,55 40.2,55 ; 40.2,55 40.5,55
ETH_MDC: U1.31 U2.34 | length 43.1
  Top Layer w0.2: v1(18.6,59.3) 18.6,58.6 18.95,58.25 U2.34 ; U1.31 v1@36.5,38.25
  Bottom Layer w0.2: v1(18.6,59.3) 17.3,58 17.3,49.3 20.9,45.7 29.8,45.7 36.5,39 v1(36.5,38.3)
ETH_MDIO: R27.1 U1.30 U2.33 | length 47.2
  Top Layer w0.2: v1(20.1,59.3) 21,59.3 21.55,58.75 U2.33 ; U1.30 34.85,37.75 35.3,37.3 36.9,37.3 37.1,37.5 v1(37.9,37.5) 38.6,37.5 38.9,37.8 R27.1
  Bottom Layer w0.2: v1(20.1,59.3) 18.1,57.3 18.1,49.5 21.2,46.4 30,46.4 37.9,38.5 v1(37.9,37.5)
ETH_RST: U1.29 U2.48 | length 35.7
  Top Layer w0.2: v1(22.1,48) 21.6,48.5 21.6,51 21.85,51.25 U2.48 ; U1.29 34.65,37.25 35.4,36.5 38.4,36.5 38.6,36.7 v1(39.3,36.7)
  Bottom Layer w0.2: v1(22.1,48) 22.8,48.7 31,48.7 33.3,46.4 33.3,44.2 39.3,38.2 v1(39.3,36.7)
ETH_RXCLK: U1.38 U2.49 | length 13.8
  Top Layer w0.2: v1@24.75,47.45 U2.49 ; U1.38 31.25,43.55 32.1,44.4 v1(32.1,45.7)
  Bottom Layer w0.2: v1(24.8,47.4) 30.4,47.4 v1(32.1,45.7)
ETH_RXD0: U1.43 U2.57 | length 7.2
  Top Layer w0.2: U1.43 U2.57
ETH_RXD1: U1.44 U2.56 | length 7.2
  Top Layer w0.2: U1.44 U2.56
ETH_RXD2: U1.45 U2.55 | length 7.2
  Top Layer w0.2: U1.45 U2.55
ETH_RXD3: U1.46 U2.54 | length 7.2
  Top Layer w0.2: U1.46 U2.54
ETH_RXDV: U1.39 U2.63 | length 7.6
  Top Layer w0.2: U1.39 30.75,46.45 31.75,47.45 U2.63
ETH_RXER: U1.41 U2.62 | length 7.8
  Top Layer w0.2: U1.41 29.75,46.35 31.25,47.85 U2.62
ETH_TXCLK: U1.1 U2.47 | length 15.3
  Top Layer w0.2: U2.47 21.65,51.75 21.1,51.2 21.1,42.2 22.55,40.75 U1.1
ETH_TXD0: U1.3 U2.45 | length 19
  Top Layer w0.2: U2.45 21.05,52.75 20.1,51.8 20.1,41.4 21.75,39.75 U1.3
ETH_TXD1: U1.4 U2.44 | length 20.7
  Top Layer w0.2: U2.44 20.75,53.25 19.6,52.1 19.6,41.2 21.55,39.25 U1.4
ETH_TXD2: U1.5 U2.36 | length 27.6
  Top Layer w0.2: U2.36 19.55,57.25 17.7,55.4 17.7,42.4 21.35,38.75 U1.5
ETH_TXD3: U1.6 U2.35 | length 29.7
  Top Layer w0.2: U2.35 19.15,57.75 16.9,55.5 16.9,42.4 21.05,38.25 U1.6
ETH_TXEN: U1.2 U2.46 | length 17.3
  Top Layer w0.2: U2.46 21.15,52.25 20.6,51.7 20.6,41.8 22.15,40.25 U1.2
GND: C1.1 C2.1 C3.1 C4.1 C5.1 C6.1 C7.1 C8.1 C9.1 C10.1 C11.1 C12.1 C13.1 C14.1 C15.1 C16.1 C17.1 C19.1 C20.1 C21.1 C23.1 C24.1 C26.1 C27.1 C29.1 C30.1 C31.1 C32.1 C33.1 C34.1 D2.2 D3.2 J1.8 J1.9 J1.10 J2.4 J2.8 J2.12 J2.16 J2.20 J3.2 J3.2A J3.2B J3.3 J3.3A J3.3B J4.3 J4.6 J4.MH1 J4.MH2 J4.SW1 P1.2 P2.2 P3.2 pad.MH1 pad.MH2 pad.MH3 R10.1 R21.1 R22.1 U1.15 U1.19 U1.35 U1.36 U1.47 U2.19 U2.23 U2.65 U2.FID1 U2.FID2 U3.4 U4.2 U5.2 U6.2 U7.2 U8.3 Y1.2 | length 173.4
  Top Layer w0.2: C33.1 6.75,36.75 7.5,36 8.8,36 ; C31.1 6.75,61.75 7.5,61 8.8,61 ; U6.2 9,61.2 ; C32.1 11.25,36.75 10.5,36 9.2,36 ; C30.1 11.15,61.75 10.4,61 9.2,61 ; U2.65@29.25,55.75 29.25,56.25 U2.23 ; 8.8,36 9,36.2 9.2,36 ; 8.8,36 9.2,36 ; 8.8,61 9,61.2 ; 8.8,61 9.2,61 ; 9,61.2 9.2,61
  Top Layer w0.3: 9,36.2 U7.2 ; J3.2B J3.2 ; C11.1 23.15,45.15 23.4,45.4 25.9,45.4 26.75,44.55 U1.47 26.75,39.95 ; U1.15 27.25,35.25 28.3,36.3 29.25,35.35 U1.19 ; U2.19 31.25,59.35 ; 32,58.5 31.7,58.8 ; U1.35 U1.36 34.95,40.75 35.35,41.15 C5.1 ; U2.FID1 34.2,59.9 33.7,59.4 33.3,59.4 33,59.1 ; 31.25,59.35 31.25,59.25 31.7,58.8 ; 31.25,59.35 31.5,59.1 33,59.1 ; 31.7,58.8 32.3,58.8 32.7,58.8 33,59.1
  Top Layer w0.5: v1(23.15,42.6) C11.1 ; U2.65@28.5,55.4 U2.65 29.25,55.75 32,58.5 32.3,58.8 32.5,59 ; U2.65@28.5,55.5 U2.65@29.25,56.25 ; C6.1@30.25,29.45 C3.1 30.25,24.55 30.945,23.855 J1.8 ; C6.1 C8.1 33.25,29.45 33.55,29.15 C7.1 37.15,29.15 38.25,30.25 R10.1 ; 31.6,58.3 31.7,58.8 ; C5.1@35.3,42.35 v1(35.3,44.1) ; C4.1 v1(38,62.7) ; Y1.2@41.1,48.095 v1(41.1,52.5) ; J4.6 v1(47.2,10.5) ; v1(53,29.5) 53,30.2 53.295,30.495 U3.4 ; J4.3 v1(54.7,9.7)
  Top Layer w0.65: U5.2 9,18.9 10.15,17.75 C27.1 ; U4.2 9,43.9 10.15,42.75 C24.1 ; C27.1@10.2,17.05 R22.1
  Top Layer w1: v1(10.15,40) C24.1
  Bottom Layer w0.3: U2.65 U2.65@28.75,54.75
  Bottom Layer w0.5: C2.1 19.35,16.35 18.755,15.755 J1.9 28.717,13.717 29.05,14.05 C1.1 32.862,15.1 ; U2.65@28.75,54.75 C19.1 ; J1.8 32.862,17.64 32.862,15.1 ; J1.10 32.862,15.1 ; C34.1 48.2,11.5 v1(47.2,10.5) 47.2,8.9 48,8.1 54.2,8.1 54.7,8.6 v1(54.7,9.7)
  Bottom Layer w0.8: C20.1 20.25,62.15 20.5,61.9 21.6,61.9 U2.65 ; 23.9,60.1 24.4,60.6 C15.1
  other v1: 6,22 28.3,36.2 42.6,39.7 16.2,40 18.7,45.8 13,56.5 14.5,56.5 16,56.5 23.5,61.1
LED_G: J1.14 R6.1 U1.28 | length 44.3
  Top Layer w0.2: U1.28 34.45,36.75 35.5,35.7 39.9,35.7 40.7,34.9 v1(41.8,34.9) R6.1
  Bottom Layer w0.2: J1.14 35.007,6.607 37.5,9.1 37.5,29.5 41.8,33.8 v1(41.8,34.9)
LED_Y: J1.12 R1.1 U1.26 | length 49.7
  Top Layer w0.2: J1.12 25.311,6.611 27.5,8.8 27.5,11.701 34.1,18.301 34.1,23 39.9,28.8 ; U1.26 34.25,35.75 35.3,34.7 39.3,34.7 39.9,34.1 39.9,29.5 ; 40.25,28.95 40.3,28.9 ; R1.1 41.8,28.9 40.5,28.9 ; 39.9,28.8 39.9,29.5 ; 39.9,28.8 40,28.9 ; 39.9,29.5 40,29.4 ; 40,28.9 40.125,29.025 ; 40,28.9 40.3,28.9 ; 40,28.9 40,29.4 ; 40,29.4 40.125,29.275 ; 40.125,29.025 40.125,29.275 ; 40.125,29.025 40.25,29.15 ; 40.125,29.275 40.25,29.15 ; 40.25,29.15 40.5,28.9 ; 40.3,28.9 40.5,28.9
NetC4_2: C4.2 R7.1 U2.20 | length 4.9
  Top Layer w0.3: U2.20 30.75,61.75 31.7,62.7 R7.1
  Top Layer w0.5: R7.1 C4.2
NetC5_2: C5.2 C6.2 C7.2 C8.2 U1.18 U1.23 U1.37 | length 20.5
  Top Layer w0.2: U1.18 28.75,32.25 29.65,31.35 C6.2 ; U1.23 31.25,40.35 31.75,40.85 U1.37
  Top Layer w0.3: 31.25,31.4 U1.23 ; U1.37@31.8,42.3 C5.2
  Top Layer w0.5: C6.2 C8.2 C7.2@34.7,31.35
NetC25_1: C25.1 R19.1 R21.2 U4.4 | length 8.2
  Top Layer w0.5: U4.4 R19.1@12.7,47.2 ; R21.2 R19.1@12.7,47.2 ; R19.1 R19.1@12.7,47.2 ; C25.1 14.75,47.2 R19.1@12.7,47.2
NetC28_1: C28.1 R20.1 R22.2 U5.4 | length 8.1
  Top Layer w0.5: U5.4@10,22.25 R20.1 ; R22.2 R20.1 ; C28.1 R20.1
NetC31_2: C31.2 U6.4 | length 2
  Top Layer w0.3: C31.2 U6.4@8.025,59.85
NetC33_2: C33.2 U7.4 | length 2
  Top Layer w0.5: C33.2@6.025,34.825 U7.4
NetD1_1: D1.1 R2.1 | length 3.2
  Top Layer w0.2: D1.1 50.25,44.15 51.25,45.15 R2.1
NetD1_2: D1.2 R4.1 U1.27 | length 65.9
  Top Layer w0.2: U1.27 34.35,36.25 35.4,35.2 39.4,35.2 40.7,33.9 40.7,32.3 41.1,31.9 v1(41.8,31.9) R4.1 ; D1.2 50.15,42.05 51.2,41 v1(52,41)
  Bottom Layer w0.2: v1(41.8,31.9) 43.9,31.9 51.9,23.9 63.3,23.9 64.4,25 64.4,30 62,32.4 58.6,32.4 52,39 v1(52,41)
NetD2_1: D2.1 R16.2 | length 3.1
  Top Layer w0.3: R16.2 12.35,70.95 13.05,71.65 D2.1
NetD3_1: D3.1 R23.2 | length 5.3
  Top Layer w0.3: R23.2 1.7,26.5 1.9,26.3 1.9,23.55 D3.1@2.2,23.25
NetJ1_11: J1.11 R5.1 | length 2.4
  Bottom Layer w0.5: R5.1@19.87,4.157 J1.11
NetJ1_13: J1.13 R8.1 | length 2.5
  Bottom Layer w0.5: R8.1@30.59,4.14 J1.13
NetJ2_15: J2.15 R30.1 U8.2 | length 10.3
  Top Layer w0.2: R30.1@60.95,44.2 R30.1
  Top Layer w0.3: U8.2 R30.1@60.95,44.2 ; R30.1 65.25,44.15 65.75,44.65 J2.15
NetJ3_1: J3.1 J3.1A J3.1B pad.MH0 S1.1 S1.2 | length 42.3
  Top Layer w1: J3.1B J3.1
  Top Layer w1.7: S1.1 2.5,8.3 3.5,7.3 pad.MH0 ; J3.1B 7,13.8 5.2,12 ; 5.2,12 S1.2 2.5,9.8 2.75,9.55 5.2,12
  Bottom Layer w1.7: pad.MH0 3.5,7.3 2.5,8.3 S1.1 ; J3.1B 7,13.8 5.2,12 ; S1.1 S1.2 5.2,12 ; S1.1 2.66,9.46 5.2,12
NetL1_1: L1.1 U4.5 | length 2.8
  Top Layer w0.65: U4.5 L1.1
NetL2_1: L2.1 U5.5 | length 2.8
  Top Layer w0.65: U5.5 L2.1
NetR10_2: R10.2 U1.24 | length 4.6
  Top Layer w0.3: U1.24 R10.2
NetR13_2: R13.2 R14.2 Y1.3 | length 5.1
  Top Layer w0.2: Y1.3@38.855,48.05 Y1.3
  Top Layer w0.3: R13.2 Y1.3@38.855,48.05 ; Y1.3 R14.2@38.875,50.825
NetR18_1: R18.1 U4.3 U7.1 | length 17.2
  Top Layer w0.2: R18.1 5.5,45.5 6,46 9.7,46 9.95,45.75 U4.3 10.9,44.8 11.4,44.3 11.4,38.8 11.1,38.5 10.2,38.5 9.95,38.25 U7.1
NetR28_1: R28.1 U1.20 | length 8.1
  Top Layer w0.2: v1(27.2,37.1) 28.7,37.1 29.75,36.05 U1.20 U1.20@29.7,33.95
  Bottom Layer w0.3: R28.1 25.65,37.45 26,37.1 v1(27.2,37.1)
NetR29_1: R29.1 U1.21 | length 8.6
  Top Layer w0.2: v1(27.8,38.3) 28.8,38.3 29.1,38 29.1,37.3 30.25,36.15 U1.21
  Bottom Layer w0.3: R29.1 26.6,38.5 26.8,38.3 v1(27.8,38.3)
PHY_CLK: R13.1 U1.34 | length 9.4
  Top Layer w0.3: U1.34 35.05,39.75 37,41.7 37,43.1 36.5,43.6 R13.1
RDN: J1.6 R12.1 U1.13 | length 25.3
  Top Layer w0.2: v1(20.2,29.75) R12.1 21.9,31.2 22.5,31.8 25.7,31.8 26.25,32.35 U1.13
  Bottom Layer w0.2: v1(20.2,29.75) 20.2,25.1 24,21.3 27.7,21.3 28.405,20.595 J1.6
RDP: J1.4 R11.2 U1.14 | length 17.5
  Top Layer w0.2: J1.4 25.865,20.735 25,21.6 25,29.5 24.75,29.75 R11.2 24,30.8 24.5,31.3 25.9,31.3 26.75,32.15 U1.14
SD_CD: J4.SW3 R26.1 U2.14 | length 85.1
  Top Layer w0.2: U2.14 38.85,57.75 39.4,57.2 v1(40.3,57.2) ; J4.SW3@42.05,24.5 v1(47.5,24.5)
  Bottom Layer w0.2: v1(40.3,57.2) 40.9,57.8 42.721,57.8 43,57.521 43,56.3 53.2,46.1 54.8,46.1 62.2,38.7 62.2,36.3 65.6,32.9 65.6,24.5 63.9,22.8 50.2,22.8 48.5,24.5 v1(47.5,24.5) 46.7,24.5 46.5,24.7 46.5,27.5 45.65,28.35 R26.1
SD_SS: J4.1 R24.1 U2.42 | length 90.4
  Top Layer w0.2: v1(20,54) 20.8,54 21.05,54.25 U2.42 ; J4.1 59.7,18.2 62,20.5 v1(62,28.5) R24.1
  Bottom Layer w0.2: v1(20,54) 20,52.3 22.9,49.4 32.7,49.4 33.7,50.4 40.5,50.4 45.9,45 45.9,34.1 52.5,27.5 58.6,27.5 59.1,28 59.1,29.2 59.5,29.6 61.7,29.6 62,29.3 v1(62,28.5)
SD_WP: J4.SW2 R25.1 U2.12 | length 90.3
  Top Layer w0.2: U2.12 39.15,56.75 39.7,56.2 40.8,56.2 41.1,56.5 v1(42.1,56.5) ; J4.SW2 39.15,26.25 39.4,26.5 42.8,26.5 43.3,26 v1(47.5,26)
  Bottom Layer w0.2: R25.1 41.2,29.5 41.6,29.9 44.9,29.9 47.5,27.3 v1(47.5,26) 48.5,26 51.1,23.4 63.6,23.4 65,24.8 65,32.6 61.6,36 61.6,38.6 54.6,45.6 53,45.6 v1(42.1,56.5)
TDN: J1.3 R9.1 U1.16 | length 19.7
  Top Layer w0.2: J1.3 25.017,17.017 27.1,19.1 27.1,29.5 26.85,29.75 R9.1 26.1,30.7 27.75,32.35 U1.16
TDP: J1.1 R3.2 U1.17 | length 26.3
  Top Layer w0.2: U1.17@28.2,33.85 U1.17 v1(28.25,31.5) R3.2@28.25,29.8
  Bottom Layer w0.2: J1.1 22.055,18.055 22.2,18.2 28.9,18.2 29.7,19 29.7,20.7 28.25,22.15 v1(28.25,31.5)
VIN: C24.2 C27.2 P1.1 R18.2 S1.3 U4.1 U5.1 U5.3 | length 99.3
  Top Layer w0.25: U5.1 8.05,20.85 8.2,21 9.8,21 9.95,20.85 U5.3
  Top Layer w0.3: v1(3.5,45.5) 3.5,42.7 4.15,42.05 R18.2
  Top Layer w0.5: R18.2 C24.2@8,42.05
  Top Layer w0.65: C27.2 U5.1 ; C24.2 U4.1
  Top Layer w1: 3.1,17 5.5,17 ; 4,18.1 4.5,18.1 5.5,17.1 5.5,17 ; 4,18.6 4,38.6 4.9,39.5 7.3,39.5 8.05,40.25 C24.2 ; C27.2 5.5,17
  Top Layer w1.7: S1.3 2.5,16.6 4,18.1
  Bottom Layer w0.3: v1(3.5,45.5) 3.5,64.9 11.2,72.6 P1.1
XM_CLK: R14.1 U2.9 | length 6.8
  Top Layer w0.3: U2.9 38.25,55.25 38.9,54.6 R14.1
XM_D4: P4.3 U2.11 | length 53
  Top Layer w0.2: U2.11 38.85,56.25 39.5,55.6 42.8,55.6 43.9,56.7 v1(43.9,56.8)
  Bottom Layer w0.2: v1(43.9,56.8) 43.9,56.847 44.546,57.493 44.546,57.254 45,56.8 45.331,56.8 45.8,56.331 45.8,56 53.8,48 56,48 57.3,49.3 57.3,62.3 55.82,63.78 P4.3
XM_D5: P4.4 U2.10 | length 52.2
  Top Layer w0.2: U2.10 38.65,55.75 39.3,55.1 44.1,55.1 44.868,55.868 v1@45,55.868
  Bottom Layer w0.2: v1(45,56) 53.5,47.5 56.4,47.5 58,49.1 58,61.9 58.36,62.26 P4.4
XM_D8: P4.5 U2.3 | length 105.3
  Top Layer w0.2: U2.3 33.15,52.25 32.7,51.8 32.7,49.9 34.9,47.7 v1(34.9,47.6) ; v1(63.4,25.4) 64.5,25.4 65.4,26.3 v1(66.6,26.3)
  Bottom Layer w0.2: v1(34.9,47.6) 40.2,47.6 43.6,44.2 43.6,33.3 52,24.9 61.6,24.9 62.1,25.4 v1(63.4,25.4) ; P4.5 60.9,63.9 58.7,61.7 58.7,48.7 63,44.4 63,36.5 66.6,32.9 v1(66.6,26.3)
XM_D9: P4.6 U2.2 | length 106.7
  Top Layer w0.2: U2.2 33.25,51.75 33.1,51.6 33.1,50.7 v1(34.9,48.9) ; v1(63.4,26.8) 64.7,26.8 65.2,27.3 67.7,27.3 68,27 v1(68,26.3)
  Bottom Layer w0.2: v1(34.9,48.9) 39.9,48.9 44.3,44.5 44.3,33.7 52.3,25.7 60.9,25.7 62,26.8 v1(63.4,26.8) ; P4.6 63.44,65.14 59.3,61 59.3,49.7 63.8,45.2 63.8,36.9 68,32.7 v1(68,26.3)
XM_D37: P4.1 U2.41 | length 57.2
  Top Layer w0.2: v1(18.4,63) 18.4,69 20,70.6 46.7,70.6 48.7,72.6 P4.1 ; v1(19.1,55) 19.2,54.9 20.4,54.9 20.55,54.75 U2.41
  Bottom Layer w0.2: v1(18.4,63) 19.3,62.1 19.3,61.5 19.6,61.2 20.7,61.2 22.6,59.3 22.6,55.6 22,55 v1(19.1,55)
XM_D38: P4.2 U2.39 | length 59.2
  Top Layer w0.2: v1(18.4,61.7) 19.3,61.7 19.7,62.1 19.7,68.7 20.5,69.5 52.4,69.5 53.28,70.38 P4.2 ; v1(19.9,56.1) 19.9,55.5 20.1,55.3 21.526,55.3 21.976,55.75 U2.39
  Bottom Layer w0.2: v1(18.4,61.7) 19.3,60.8 20.5,60.8 22.2,59.1 22.2,55.85 21.75,55.4 20.6,55.4 v1(19.9,56.1)
XM_FL_CS: R15.1 U2.15 U3.1 | length 42.9
  Top Layer w0.2: U2.15 44.35,58.25 47.4,55.2 47.4,39 52.1,34.3 U3.1@55.05,34.3 ; U3.1 55.05,34.85 55.4,35.2 55.8,35.2 56.15,35.55 R15.1
XM_FL_MISO: J4.7 R31.1 U2.16 U3.2 | length 77.4
  Top Layer w0.2: U2.16 44.85,58.75 48,55.6 48,40 v1(51,37) 53.6,37 53.9,37.3 R31.1 ; J4.7 44.7,13.7 52,21 v1(52,31) 52,32.3 52.7,33 U3.2@55.05,33
  Bottom Layer w0.2: v1(51,37) 51,31.2 51.2,31 v1(52,31)
XM_FL_MOSI: J4.2 U2.64 U3.5 | length 72.7
  Top Layer w0.2: U2.64 32.25,48.35 32.6,48 v1(33.4,48) ; J4.2 57.2,18.3 60.3,21.4 v1@60.3,28.445 ; U3.5@60.3,30.445 v1(60.3,28.5) v1@60.3,28.445 ; v1@60.35,28.495 v1@60.3,28.445
  Bottom Layer w0.2: v1(33.4,48) 33.4,49.1 34.1,49.8 40,49.8 45.1,44.7 45.1,33.9 52.5,26.5 59.6,26.5 60.3,27.2 v1@60.3,28.495
XM_FL_SCK: J4.5 U2.1 U3.6 | length 69.5
  Top Layer w0.2: U2.1 v1@36.45,51.25 ; J4.5 49.7,14.7 57.8,22.8 v1(57.8,28.5) 57.8,31.1 58.465,31.765 U3.6
  Bottom Layer w0.2: v1@36.45,51.3 v1(36.5,51.3) 40.7,51.3 46.7,45.3 46.7,34.3 52.5,28.5 v1(57.8,28.5)
XM_LED: R16.1 U2.38 | length 20.3
  Top Layer w0.3: R16.1 15.9,69.9 17.1,68.7 v1(17.1,63) ; v1@21.25,56.25 U2.38
  Bottom Layer w0.2: v1(17.1,63) 17.1,61.6 18.4,60.3 20.4,60.3 21.2,59.5 v1(21.2,56.2)
XM_RST: R17.1 U2.8 U2.26 U6.1 U8.4 | length 110.4
  Top Layer w0.2: U2.26 v1(27.75,62.7) ; U2.8 35.15,54.75 35.8,54.1 v1(36.5,54.1)
  Top Layer w0.3: v1(8.05,65) 9,65 9.95,64.05 ; U6.1 9.95,63.35 ; R17.1 v1(14.1,63.8) 10.4,63.8 ; v1(55,50) 55,45.4 55.25,45.15 U8.4 ; 9.95,63.35 9.95,64.05 ; 9.95,63.35 10.4,63.8 ; 9.95,64.05 10.2,63.8 10.4,63.8
  Bottom Layer w0.3: v1(8.05,65) 8.05,66.15 10.9,69 41.6,69 55,55.6 v1(55,50) ; v1(14.1,63.8) 14.1,63.9 15.5,65.3 25.1,65.3 v1@27.7,62.7 ; v1(27.75,62.7) 29,62.7 36.5,55.2 v1(36.5,54.1)
XM_TCK: J2.9 U2.29 | length 54.1
  Top Layer w0.2: U2.29@26.3,60.75 U2.29 26.25,63.65 28.5,65.9 55.9,65.9 65.6,56.2 v1(66.6,56.2)
  Bottom Layer w0.2: v1(66.6,56.2) 66.6,52.8 67.13,52.27 J2.9
XM_TDI: J2.5 U2.30 | length 51.3
  Top Layer w0.2: U2.30 25.75,64.15 28.2,66.6 57.8,66.6 67.05,57.35 J2.5
XM_TDO: J2.13 U2.31 | length 67.7
  Top Layer w0.2: U2.31 25.25,64.65 27.9,67.3 59.2,67.3 v1(63.5,63)
  Bottom Layer w0.2: v1(63.5,63) 60,59.5 60,52.9 65.71,47.19 J2.13
XM_TMS: J2.7 U2.27 | length 49.7
  Top Layer w0.2: U2.27 27.25,61.75 26.8,62.2 26.8,63.2 28.8,65.2 54.3,65.2 64.69,54.81 J2.7
XM_TRST: J2.3 U2.24 U2.25 | length 49.5
  Top Layer w0.2: U2.24 28.75,63.85 29.4,64.5 52.4,64.5 61.5,55.4 v1(61.6,55.4)
  Top Layer w0.3: U2.25 U2.24
  Bottom Layer w0.2: v1(61.6,55.4) 62.8,55.4 67.29,59.89 J2.3
pads on no net: J1.7 J1.MH1 J1.MH2 J2.1 J2.2 J2.6 J2.10 J2.11 J2.14 J2.17 J2.18 J2.19 J4.8 J4.9 J4.MH3 J4.MH4 U1.7 U1.8 U1.9 U1.10 U1.11 U1.12 U1.25 U1.33 U1.40 U1.42 U2.5 U2.7 U2.17 U2.22 U2.50 U2.51 U2.58 U2.59 U6.3 U7.3 U8.1

## Polygon pours and split planes (outlines as drawn)
GND on Top Layer "Top Layer-GND" (solid, remove dead copper, pour order 2): 0.5,0.5 0.5,74.5 74.5,74.5 74.5,0.5
GND on Bottom Layer "Bottom Layer-GND" (solid, remove dead copper, pour order 4): 0.5,0.5 0.5,74.5 74.5,74.5 74.5,0.5

## Keep-outs
Keep-Out Layer:
  the board outline again, w0.3

## Silkscreen, mask and mechanical layers (free items; w line width, h text height)
Top Overlay:
  drawing of 5417 lines, arcs and shapes, not listed
  text "1P" at 17.7,72.1 h1.2
  text "D10" at 32.8,67.9 h1.2 r45
  text "VIN" at 23.6,67.7 h1.2 r45
  text "GND" at 26.4,67.7 h1.2 r45
  text "GND" at 35.3,67.7 h1.2 r45
  text "D33" at 41.5,67.7 h1.2 r45
  text "GND" at 44.3,67.7 h1.2 r45
  text "X0D4" at 53.6,66.9 h1.2 r45
  text "X0D8" at 58.6,66.9 h1.2 r45
  text "X0D9" at 61.2,66.9 h1.2 r45
  text "X0D5" at 56.04,66.8 h1.2 r45
  text "X0D37" at 47.4,66 h1.2 r45
  text "X0D38" at 50.1,66 h1.2 r45
  text "XSYS2 CON" at 64.4,44.9 h1.52 r90
  text "SPEED" at 47.7,41.4 h1.2 r90
  text "SD Card" at 47.8,20.4 h1.52
Bottom Overlay:
  lines w0.2: 72.55,49.75 73.5,49.75 ; 72.6,39.5 73.5,39.5 73.5,60 72.6,60 ; 72.6,44.6 73.5,44.6 ; 72.6,54.8 73.5,54.8
  text "GND" at 68.9,68.2 h1.2
  text "GND" at 2.9,64.7 h1.2 r270
  text "TRST" at 66.9,59.3 h1.2
  text "TDI" at 66.9,57.1 h1.2
  text "TMS" at 66.9,54.1 h1.2
  text "TCK" at 66.9,51.8 h1.2
  text "TDO" at 66.9,46.7 h1.2
  text "RST" at 66.9,44.1 h1.2
  text "GND" at 72.4,35.7 h1.2 r270
  text "GND" at 70.9,7.1 h1.2 r270
  text "DC IN" at 12.5,2.7 h1.2
Mechanical 2:
  the board outline again, w0.3
Drill Drawing:
  text ".LEGEND" at 77.493,0.254 h1.52
  text "Drill Drawing." at 77.493,-2.286 h1.52

## Dimensions
0,0 to 0,75 on Mechanical 2
0,0 to 75,0 on Mechanical 2

## Text inside footprints (layer, text, board x,y; h text height)
J1: Top Overlay "G" at 28.586,3.656 h1.52; Top Overlay "Y" at 23.069,3.403 h1.52
J2: Top Overlay "19" at 67.98,38.37 h1.5 r270; Top Overlay "20" at 70.52,38.37 h1.5 r270; Top Overlay "1" at 67.98,64.13 h1.5 r270; Top Overlay "2" at 70.52,64.63 h1.5 r270
J3: Mechanical 1 "PLATED SLOT 1mm wide -  3 slots" at 0.4,-2.2 h0.6